# Altium PCB PCB1.PcbDoc
Units mil, origin at the board's own origin, x right, y up, seen from the top; angles counter-clockwise.
Board outline 6000 x 4000 mil, 2 copper layers (Top Layer, Bottom Layer); 36 components, 48 nets, 72 pads, 0 vias.
Unrouted connection lines stored in the file: 41.
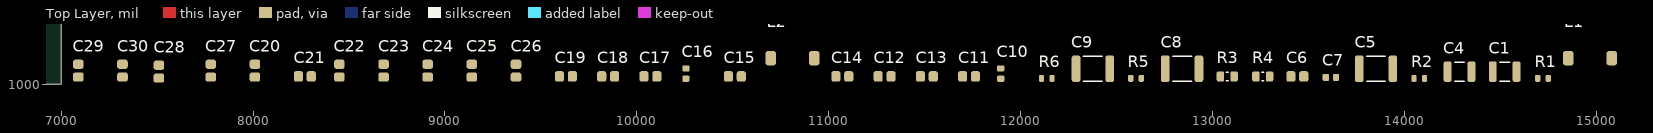
[diagram p0: Top Layer view]
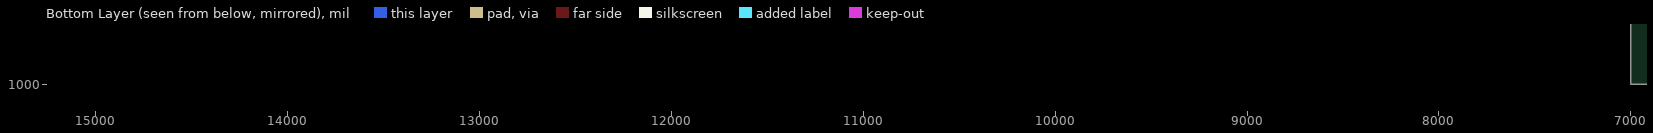
[diagram p1: Bottom Layer view, seen from below]

## Layer stack, top to bottom
Top Solder: solder mask 0.4, Solder Resist, Dk 3.5
Top Layer: signal copper 1.4
Dielectric 1: dielectric 12.6, FR-4, Dk 4.8
Bottom Layer: signal copper 1.4
Bottom Solder: solder mask 0.4, Solder Resist, Dk 3.5

## Board outline
1000,1000 7000,1000 7000,5000 1000,5000

## Design rules (kind name [scope] priority, off if disabled: settings)
Clearance [All] p1: gap=10 ignorepadtopadclearanceinfootprint=FALSE
PolygonConnect [All] p1: connectstyle=Relief reliefconductorwidth=10 reliefentries=4 polygonreliefangle="90 Angle" airgapwidth=10
RoutingVias [All] p1: holewidth=28 width=50 viastyle="Through Hole" minholewidth=28 minwidth=50 maxholewidth=28 maxwidth=50
SolderMaskExpansion [All] p1: expansion=4 istentingtop=FALSE
SupplyNets "Schematic Supply Nets" [InNet('GND')] p1: voltage=0.000
Width [All] p1: maxlimit=10 minlimit=10 preferedwidth=10
30 further rules are at their usual default settings.

## Components (designator, comment, footprint, x,y, rotation, side; value= is the part's Value field where it differs from the comment)
C1 "Конденсатор GRM32ER71E226K (22 мкФ +-10% X7R 25В)" C_1210 14520,1065 r0 top
C4 "Конденсатор GRM32ER71E226K (22 мкФ +-10% X7R 25В)" C_1210 14285,1065 r0 top
C5 "Конденсатор 0603 0,1 мкФ ±10% 50 В X7R" C_1812 13850,1080 r0 top
C6 "Конденсатор GRM21BR61A106K (10 мкФ +-10% X5R 10В)" C_0805 13440,1040 r0 top
C7 "Конденсатор GRM188R71C104K (0.10 мкФ +-10% X7R 16В)" C_0603 13615,1035 r0 top
C8 "Конденсатор 0402 22 пФ ±5% 50 В NP0" C_1812 12840,1080 r0 top
C9 "Конденсатор 0402 22 пФ ±5% 50 В NP0" C_1812 12375,1080 r0 top
C10 "Конденсатор GRM188R71C104K (0.10 мкФ +-10% X7R 16В)" C_0603 11895,1055 r90 top
C11 "Конденсатор GRM21BR71H104K (0.10 мкФ +-10% X7R 50В)" C_0805 11730,1040 r0 top
C12 "Конденсатор 0402 2,2 пФ ±0,25 пФ 50 В NP0" C_0805 11290,1040 r0 top
C13 "Конденсатор 0402 2,2 пФ ±0,25 пФ 50 В NP0" C_0805 11510,1040 r0 top
C14 "Конденсатор GRM2165C1H331J (330 пФ +-5% COG 50В)" C_0805 11070,1040 r0 top
C15 "Конденсатор GRM2165C1H331J (330 пФ +-5% COG 50В)" C_0805 10510,1040 r0 top
C16 "Конденсатор GRM1885C1H102J (1.0 нФ +-5% COG 50В)" C_0603 10255,1055 r90 top
C17 "Конденсатор GRM21BR71H104K (0.10 мкФ +-10% X7R 50В)" C_0805 10070,1040 r0 top
C18 "Конденсатор GRM2165C1H331J (330 пФ +-5% COG 50В)" C_0805 9850,1040 r0 top
C19 "Конденсатор GRM2165C1H331J (330 пФ +-5% COG 50В)" C_0805 9630,1040 r0 top
C20 "Конденсатор GRM21BR71H104K (0.10 мкФ +-10% X7R 50В)" C_0805 8010,1070 r90 top
C21 "Конденсатор GRM21BR71H104K (0.10 мкФ +-10% X7R 50В)" C_0805 8270,1040 r0 top
C22 "Конденсатор GRM21BR71H104K (0.10 мкФ +-10% X7R 50В)" C_0805 8450,1070 r90 top
C23 "Конденсатор GRM21BR71H104K (0.10 мкФ +-10% X7R 50В)" C_0805 8680,1070 r90 top
C24 "Конденсатор GRM21BR71H104K (0.10 мкФ +-10% X7R 50В)" C_0805 8910,1070 r90 top
C25 "Конденсатор GRM21BR71H104K (0.10 мкФ +-10% X7R 50В)" C_0805 9140,1070 r90 top
C26 "Конденсатор GRM21BR61E106K (10 мкФ +-10% X5R 25В)" C_0805 9370,1070 r90 top
C27 "Конденсатор GRM2165C1H331J (330 пФ +-5% COG 50В)" C_0805 7780,1070 r90 top
C28 "Конденсатор GRM2165C1H331J (330 пФ +-5% COG 50В)" C_0805 7510,1065 r90 top
C29 "Конденсатор GRM2165C1H331J (330 пФ +-5% COG 50В)" C_0805 7090,1070 r90 top
C30 "Конденсатор GRM2165C1H331J (330 пФ +-5% COG 50В)" C_0805 7320,1070 r90 top
L1 "Фильтр ферритовый 0805 120 Ом 2 А" L_CDRH64B 14965,1135 r0 top
L2 "Фильтр ферритовый 0805 60 Ом 2 А" L_CDRH64B 10810,1135 r0 top
R1 "Резистор RC0603JR-071K5L (1.5 кОм +-5%)" R_0603 14720,1030 r0 top
R2 "Резистор RC0603JR-0710KL (10 кОм +-5%)" R_0603 14075,1030 r0 top
R3 "Резистор RC0805JR-075K1L (5.1 кОм +-5%)" R_0805 13075,1040 r0 top
R4 "Резистор RC0805JR-075K1L (5.1 кОм +-5%)" R_0805 13260,1040 r0 top
R5 "Резистор RC0603JR-0710KL (10 кОм +-5%)" R_0603 12600,1030 r0 top
R6 "Резистор RC0603JR-0710KL (10 кОм +-5%)" R_0603 12135,1030 r0 top

## Footprints (in the part's own frame and the unit in brackets; to place one, negate y for a bottom-side part, rotate by r counter-clockwise, add the part's x,y. Pads: shape width x height; smd on the part's side, far side on the other; paste and mask are expansions set on the pad)
C_0603 [mm] "Chip Capacitor, 2-Leads, Body 1.60x0.80mm, IPC Medium Density"
  rrect50% 0.85x0.95 smd: 1(-0.675,0) 2(0.675,0)
  body extent -0.87,-0.48 0.87,0.48, height 0.9
C_0805 [mm] "Chip Capacitor, 2-Leads, Body 2.00x1.25mm, IPC Medium Density"
  rrect50% 1.2x1.4 smd: 1(-0.85,0) 2(0.85,0)
  body extent -1.1,-0.72 1.1,0.72, height 1.45
C_1210 [mm] "Chip Capacitor, 2-Leads, Body 3.20x2.50mm, IPC Medium Density"
  rrect50% 1.05x2.7 smd: 1(-1.575,0) 2(1.575,0)
  silkscreen extent -0.65,-1.25 0.65,1.25, body extent -1.8,-1.4 1.8,1.4, height 2.7
C_1812 [mm] "Chip Capacitor, 2-Leads, Body 4.50x3.20mm, IPC Medium Density"
  rrect50% 1.15x3.5 smd: 1(-2.225,0) 2(2.225,0)
  silkscreen extent -1.25,-1.65 1.25,1.65, body extent -2.45,-1.8 2.45,1.8, height 2.7
L_CDRH64B [mm]
  rrect50% 1.4x1.9 smd: 1(-2.875,0) 2(2.875,0)
R_0603 [mm] "Chip Resistor, 2-Leads, Body 1.60x0.80mm, IPC Medium Density"
  rrect50% 0.7x0.9 smd: 1(-0.7,0) 2(0.7,0)
  body extent -0.85,-0.45 0.85,0.45, height 0.55
R_0805 [mm] "Chip Resistor, 2-Leads, Body 2.00x1.25mm, IPC Medium Density"
  rrect50% 1x1.35 smd: 1(-0.9,0) 2(0.9,0)
  silkscreen extent -0.1,-0.58 0.1,0.58, body extent -1.05,-0.67 1.05,0.67, height 0.6

## Part data
C1 C4: Capacitance=22u, Dielectric Type=X7R, Maximum Voltage=25V, Tolerance=±10%, HelpURL=http://search.murata.co.jp/Ceramy/image/img/A01X/G101/ENG/GRM32ER71E226KE15-01.pdf, Part Number="Конденсатор GRM32ER71E226K (22 мкФ +-10% X7R 25В)"
C5: library part "Конденсатор GRM43DR72J104K (0.10 мкФ +-10% X7R 630В)", Capacitance=0.1u, Dielectric Type=X7R, Maximum Voltage=630V, Tolerance=±10%, HelpURL=http://search.murata.co.jp/Ceramy/image/img/A01X/G101/ENG/GRM43DR72J104KW01-01.pdf, Part Number="Конденсатор GRM43DR72J104K (0.10 мкФ +-10% X7R 630В)"
C6: Capacitance=10u, Dielectric Type=X5R, Maximum Voltage=10V, Tolerance=±10%, HelpURL=http://search.murata.co.jp/Ceramy/image/img/A01X/G101/ENG/GRM21BR61A106KE14-01.pdf, Part Number="Конденсатор GRM21BR61A106K (10 мкФ +-10% X5R 10В)"
C7 C10: Capacitance=0u1, Dielectric Type=X7R, Maximum Voltage=16V, Tolerance=±10%, HelpURL=http://search.murata.co.jp/Ceramy/image/img/A01X/G101/ENG/GRM188R71C104KA01-01.pdf, Part Number="Конденсатор GRM188R71C104K (0.10 мкФ +-10% X7R 16В)"
C8 C9: library part "Конденсатор GRM43DR72J104K (0.10 мкФ +-10% X7R 630В)", Capacitance=22p, Dielectric Type=X7R, Maximum Voltage=630V, Tolerance=±10%, HelpURL=http://search.murata.co.jp/Ceramy/image/img/A01X/G101/ENG/GRM43DR72J104KW01-01.pdf, Part Number="Конденсатор GRM43DR72J104K (0.10 мкФ +-10% X7R 630В)"
C11 C17 C20 C21 C22 C23 C24 C25: Capacitance=0u1, Dielectric Type=X7R, Maximum Voltage=50V, Tolerance=±10%, HelpURL=http://search.murata.co.jp/Ceramy/image/img/A01X/G101/ENG/GRM21BR71H104KA01-01.pdf, Part Number="Конденсатор GRM21BR71H104K (0.10 мкФ +-10% X7R 50В)"
C12 C13: library part "Конденсатор GRM21BR71C105K (1.0 мкФ +-10% X7R 16В)", Capacitance=1u, Dielectric Type=X7R, Maximum Voltage=16V, Tolerance=±10%, HelpURL=http://search.murata.co.jp/Ceramy/image/img/A01X/G101/ENG/GRM21BR71C105KA01-01.pdf, Part Number="Конденсатор GRM21BR71C105K (1.0 мкФ +-10% X7R 16В)"
C14 C15 C18 C19 C27 C28 C29 C30: Capacitance=300p, Dielectric Type=C0G, Maximum Voltage=50V, Tolerance=±5%, HelpURL=http://search.murata.co.jp/Ceramy/image/img/A01X/G101/ENG/GRM2165C1H331JA01-01.pdf, Part Number="Конденсатор GRM2165C1H331J (330 пФ +-5% COG 50В)"
C16: Capacitance=1n, Dielectric Type=C0G, Maximum Voltage=50V, Tolerance=±5%, HelpURL=http://search.murata.co.jp/Ceramy/image/img/A01X/G101/ENG/GRM1885C1H102JA01-01.pdf, Part Number="Конденсатор GRM1885C1H102J (1.0 нФ +-5% COG 50В)"
C26: Capacitance=10u, Dielectric Type=X5R, Maximum Voltage=25V, Tolerance=±10%, HelpURL=http://search.murata.co.jp/Ceramy/image/img/A01X/G101/ENG/GRM21BR61E106KA73-01.pdf, Part Number="Конденсатор GRM21BR61E106K (10 мкФ +-10% X5R 25В)"
L1 L2: library part "Дроссель CDRH64BNP-221MC-B (220 мкГн +-20%)", DC Resistance="2.08 Ohm", Inductance=220u, Rated Current="290 mA", Saturation Current="400 mA", Tolerance=±20%, HelpURL=http://www.mouser.com/ds/2/390/CDRH64B-465687.pdf, Part Number="Дроссель CDRH64BNP-221MC-B (220 мкГн +-20%)"
R1: Maximum Overload Voltage=100V, Maximum Working Voltage=50V, Power="0.1 W", Resistance=1k5, Tolerance=±5%, HelpURL=http://www.yageo.ru/pdf/RC0603.pdf, Part Number="Резистор RC0603JR-071K5L (1.5 кОм +-5%)"
R2 R5 R6: Maximum Overload Voltage=100V, Maximum Working Voltage=50V, Power="0.1 W", Resistance=10k, Tolerance=±5%, HelpURL=http://www.yageo.ru/pdf/RC0603.pdf, Part Number="Резистор RC0603JR-0710KL (10 кОм +-5%)"
R3 R4: Maximum Overload Voltage=300V, Maximum Working Voltage=150V, Power="0.125 W", Resistance=5k1, Tolerance=±5%, HelpURL=http://www.yageo.ru/pdf/RC0805.pdf, Part Number="Резистор RC0805JR-075K1L (5.1 кОм +-5%)"

## Nets (pads, with @x,y where several pads share a name; then routed paths per layer and width w, separated by ;. In a path a pad name is that pad's centre, name@x,y a point inside that pad or via, vN(x,y) a via of type N, cw(c..) or ccw(c..) an arc to the next point about the centre after c; other vN are vias at no path point)
GND: C1.1 C4.1 C5.2 C6.2 C7.2 C8.2 C9.2 C10.2 C11.2 C12.2 C13.2 C14.2 C15.2 C16.2 C17.2 C18.2 C19.2 C20.1 C20.2 C21.1 C21.2 C22.1 C22.2 C23.1 C23.2 C24.1 C24.2 C25.1 C25.2 C26.1 C26.2 C27.2 C28.2 R1.1 R3.1 R4.1 R6.2
Net*1_29: C1.2
Net*2_29: C4.2 L1.2
Net*3_29: R2.2
Net*4_29: 
Net*5_29: 
Net*6_29: 
Net*7_29: 
Net*8_29: 
Net*9_29: C5.1 R2.1
Net*10_29: C6.1 C7.1
Net*11_29: 
Net*12_29: 
Net*13_29: 
Net*14_29: R5.1
Net*15_29: 
Net*16_29: 
Net*17_29: C16.1
Net*18_29: L2.1
Net*19_29: C11.1 C17.1 L2.2
Net*20_29: 
Net*21_29: 
Net*23_29: 
Net*24_29: 
Net*25_29: 
NetC2_2: L1.1
NetC8_1: C8.1
NetC9_1: C9.1
NetC10_1: C10.1
NetC12_1: C12.1
NetC13_1: C13.1
NetC14_1: C14.1
NetC15_1: C15.1
NetC18_1: C18.1
NetC19_1: C19.1
NetC27_1: C27.1
NetC28_1: C28.1
NetC29_2: C29.2
NetC30_1: C30.1
NetDD1_72: 
NetDD1_76: 
NetDD1_94: R6.1
NetDD2_15: 
NetDD2_16: 
NetDD2_19: R5.2
NetH1_2: R1.2
NetR3_2: R3.2
NetR4_2: R4.2
pads on no net: C29.1 C30.2